# Altium PCB 175-00037, rev2, Front Panel, Mirror Cell Controller .PcbDoc
Units mil, origin at the board's own origin, x right, y up, seen from the top; angles counter-clockwise.
Board outline 2283.46 x 2362.2 mil, 4 copper layers (Top Layer, Internal Plane 1 (*.GP1), Internal Plane 2 (*.GP2), Bottom Layer); 19 components, 40 nets, 170 pads, 4 vias.
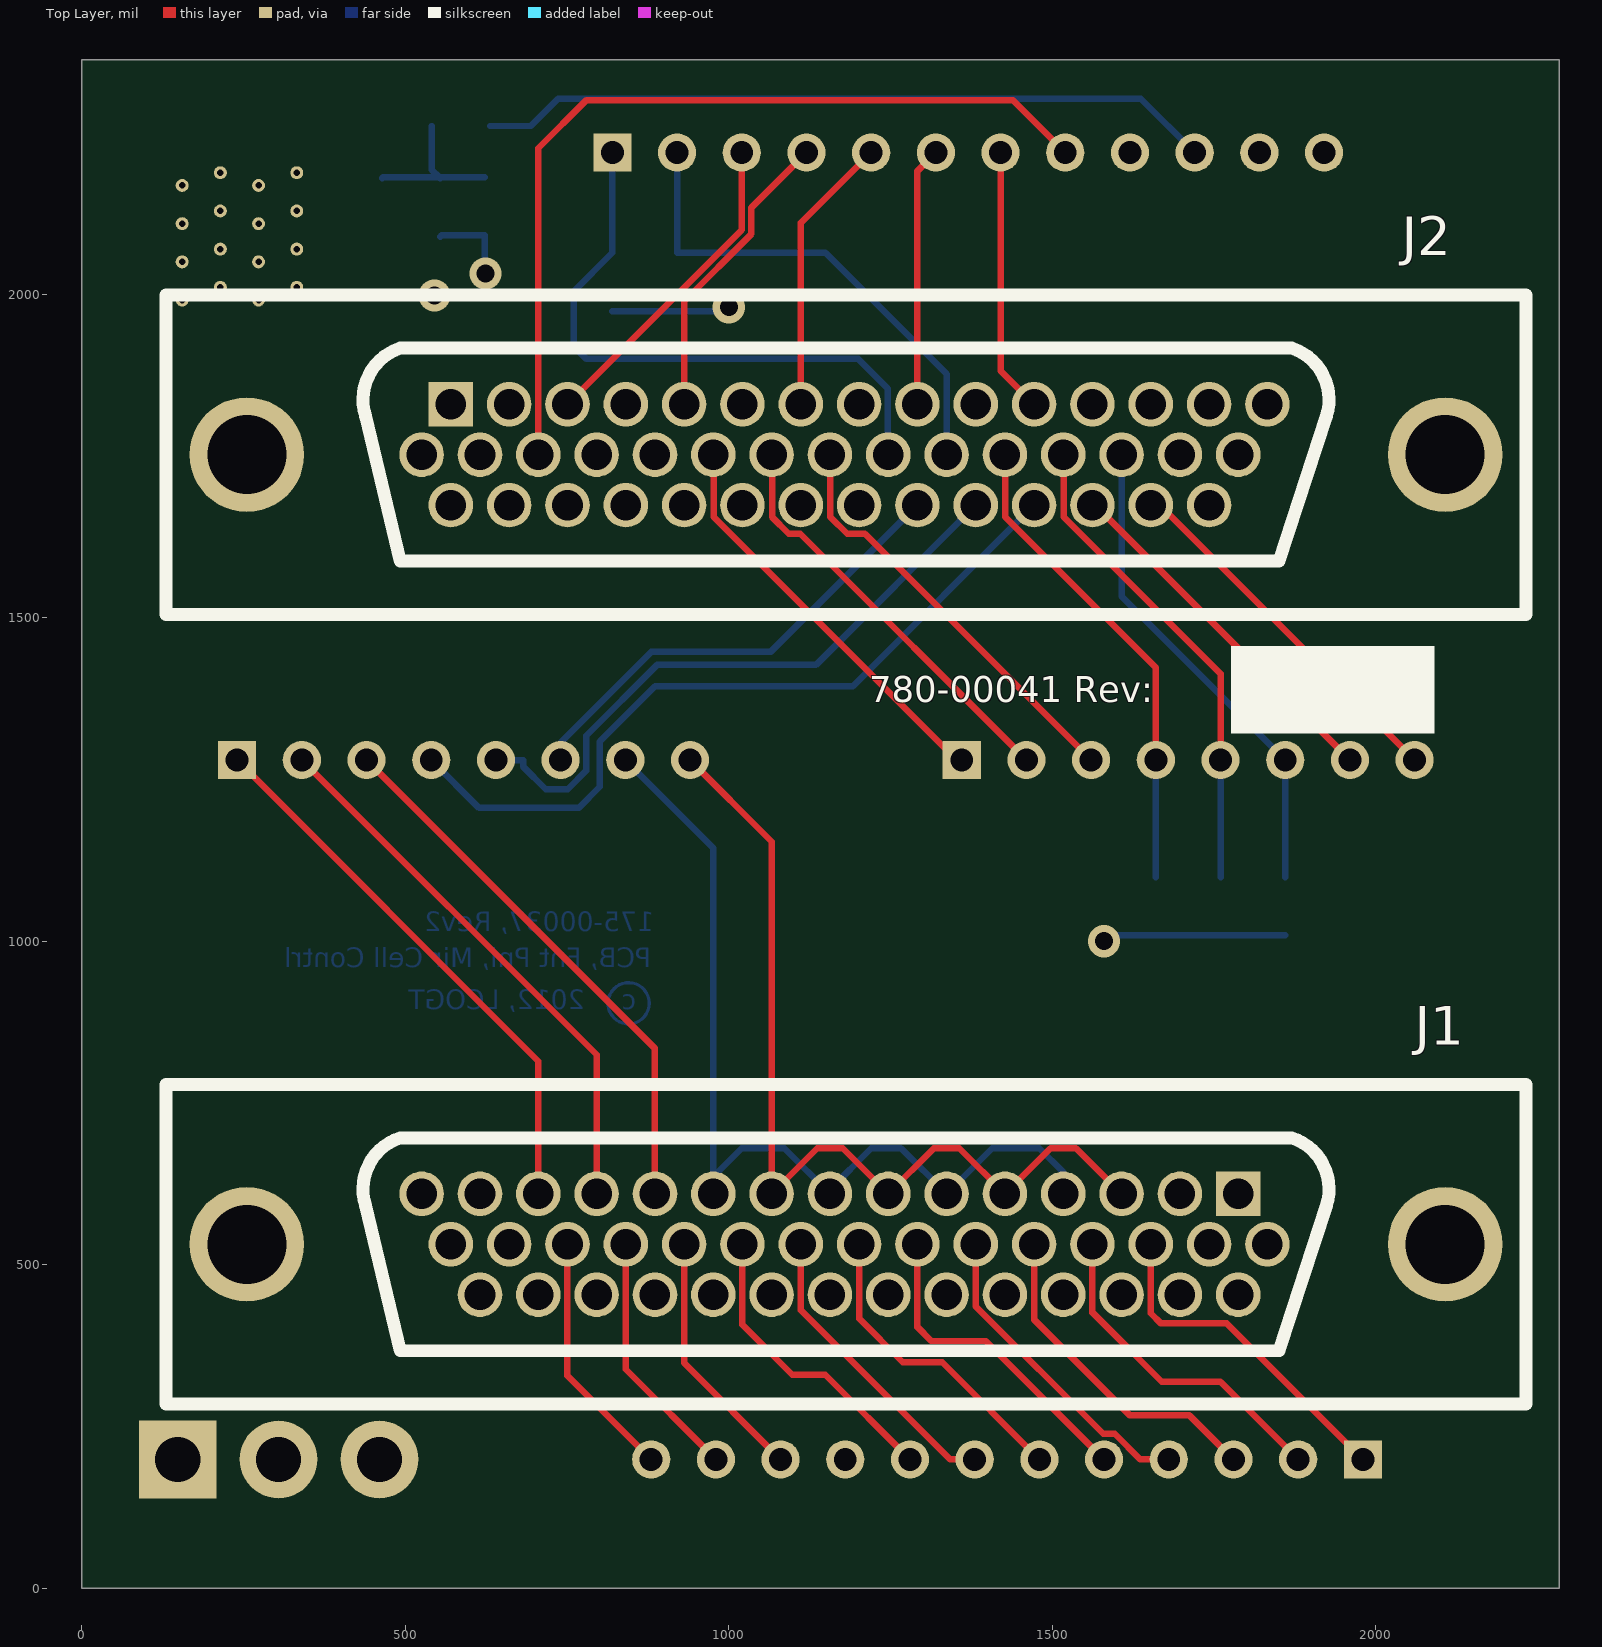
[diagram p0: Top Layer view]
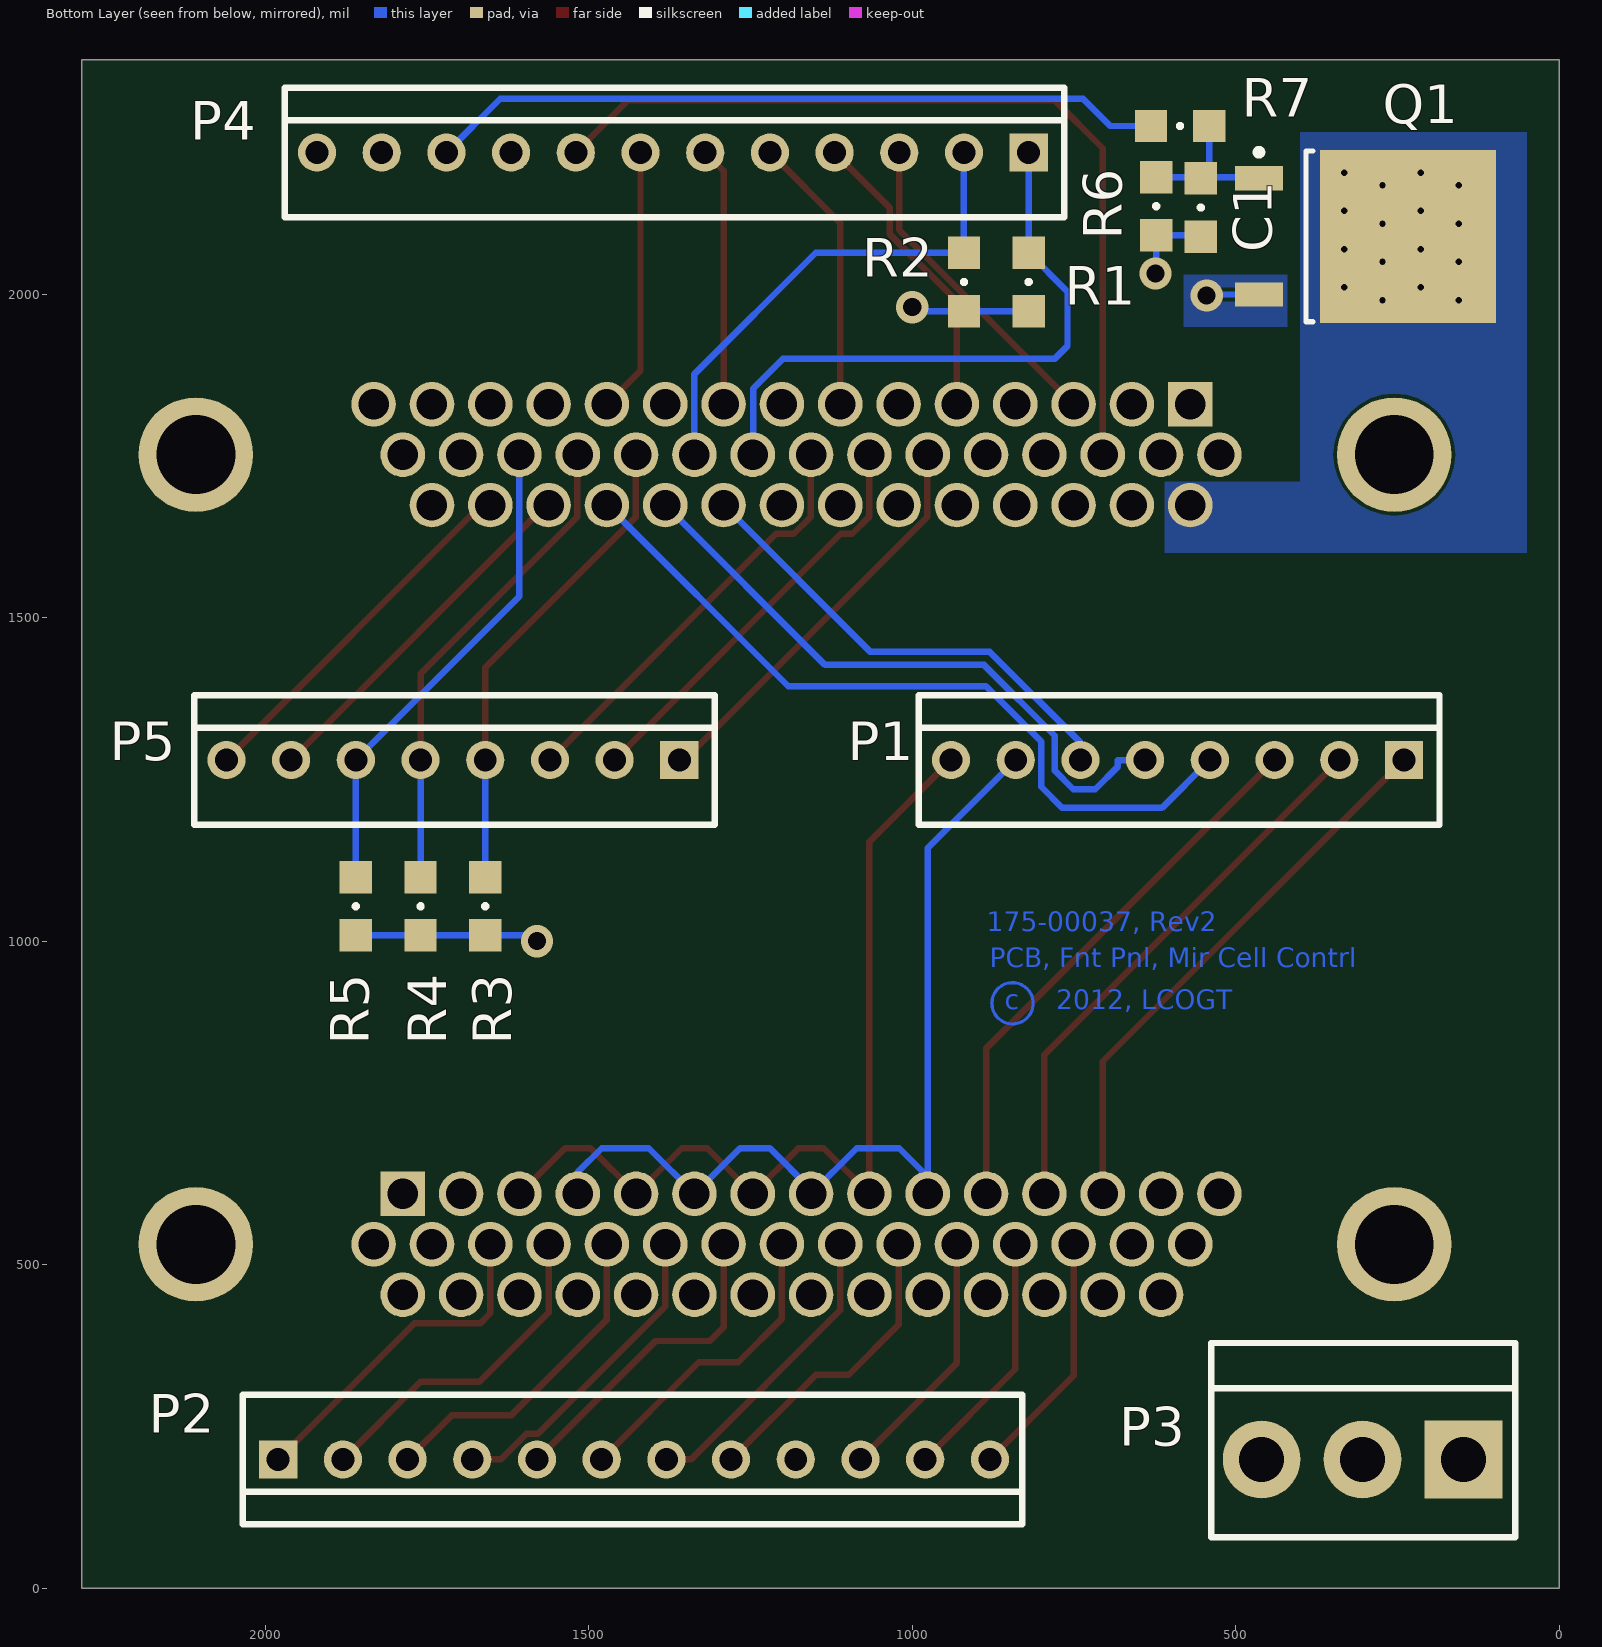
[diagram p1: Bottom Layer view, seen from below]
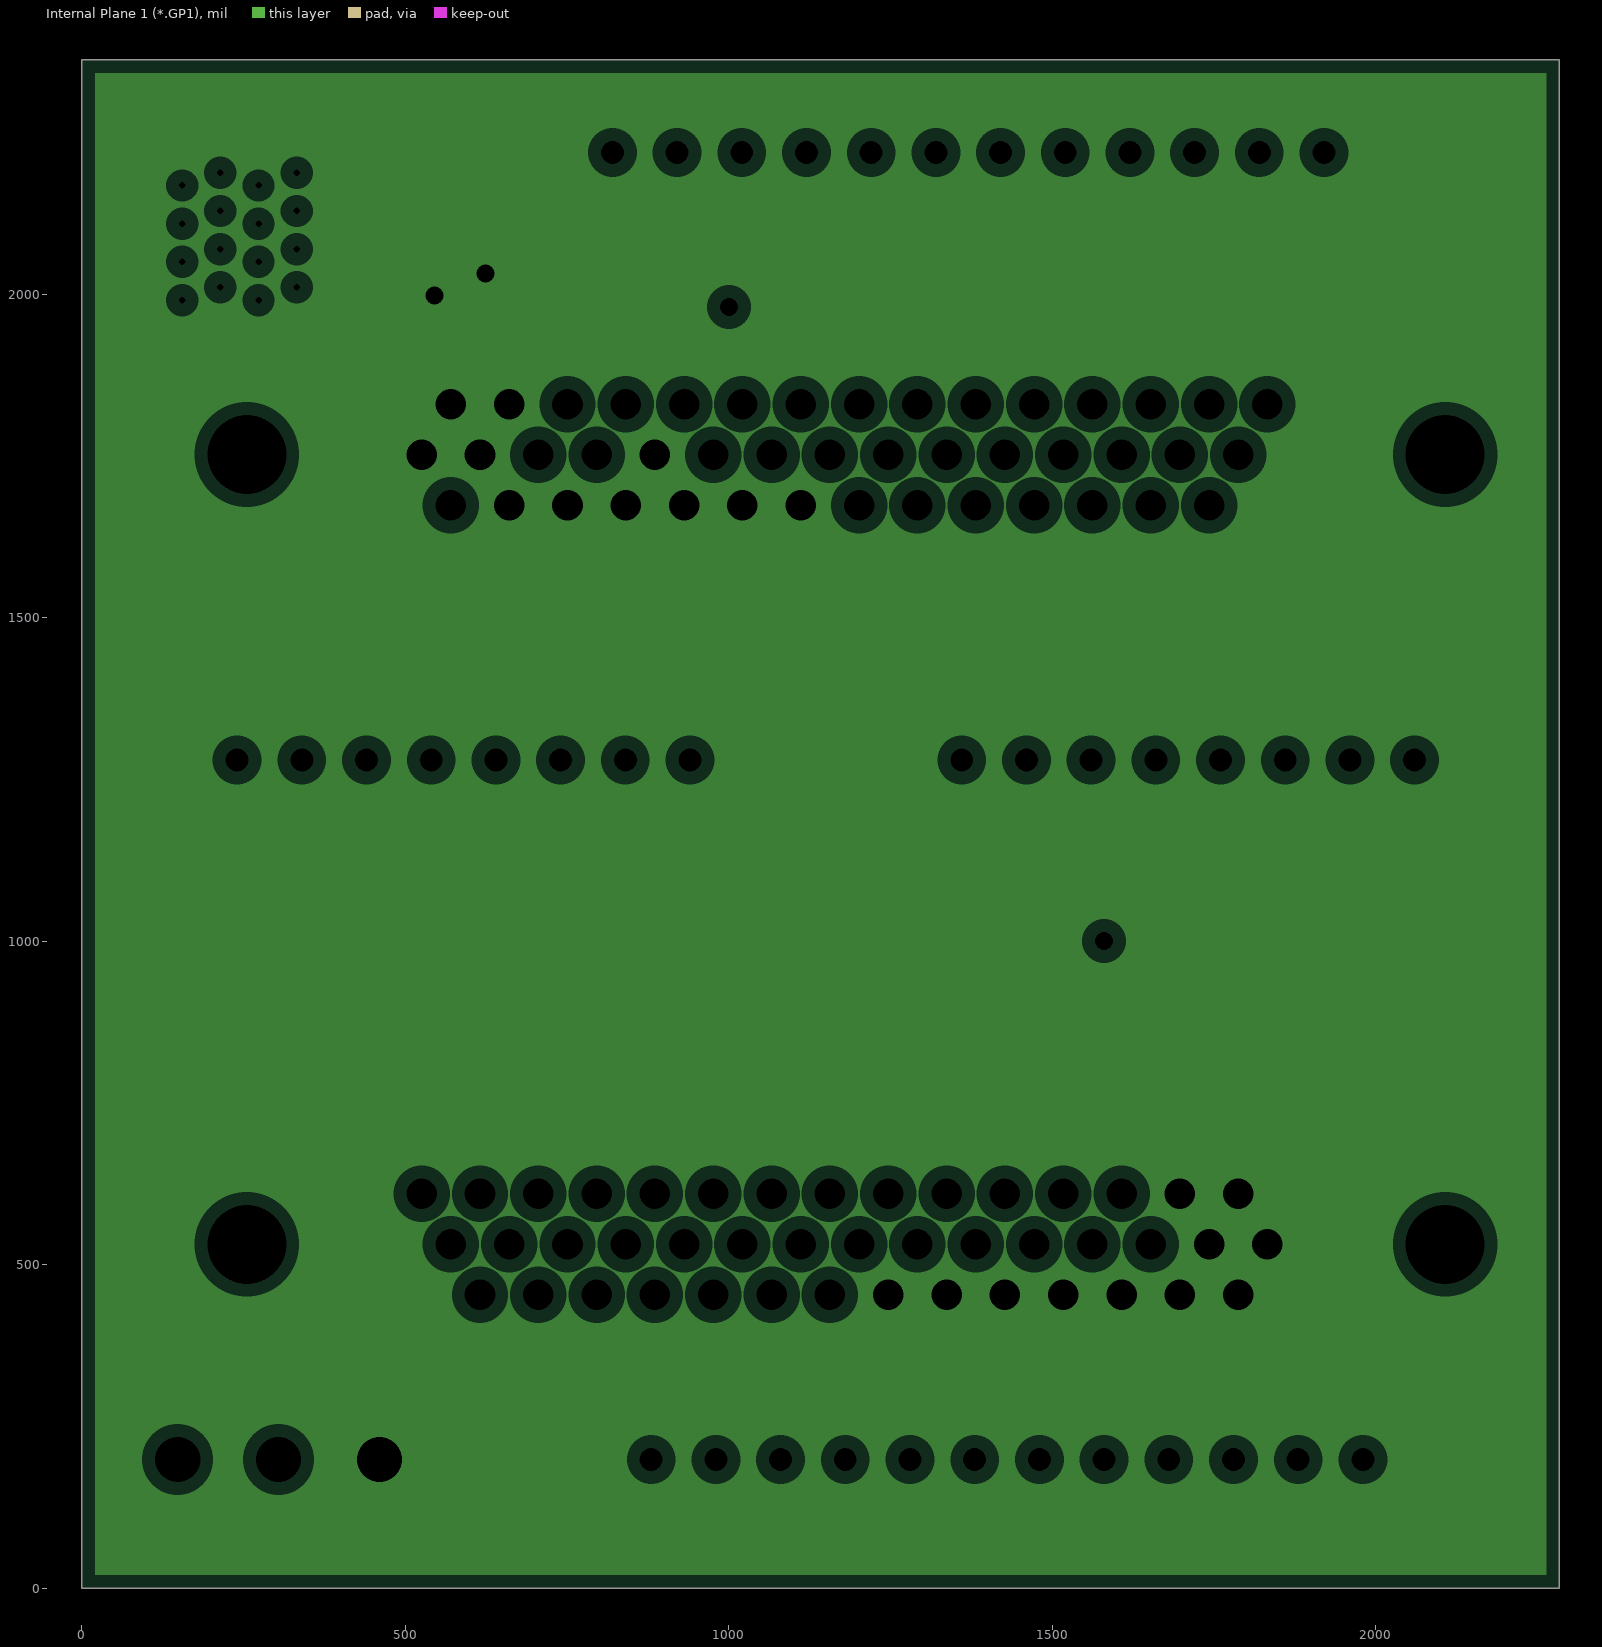
[diagram p2: Internal Plane 1 (*.GP1), clearances drawn from the general rule]
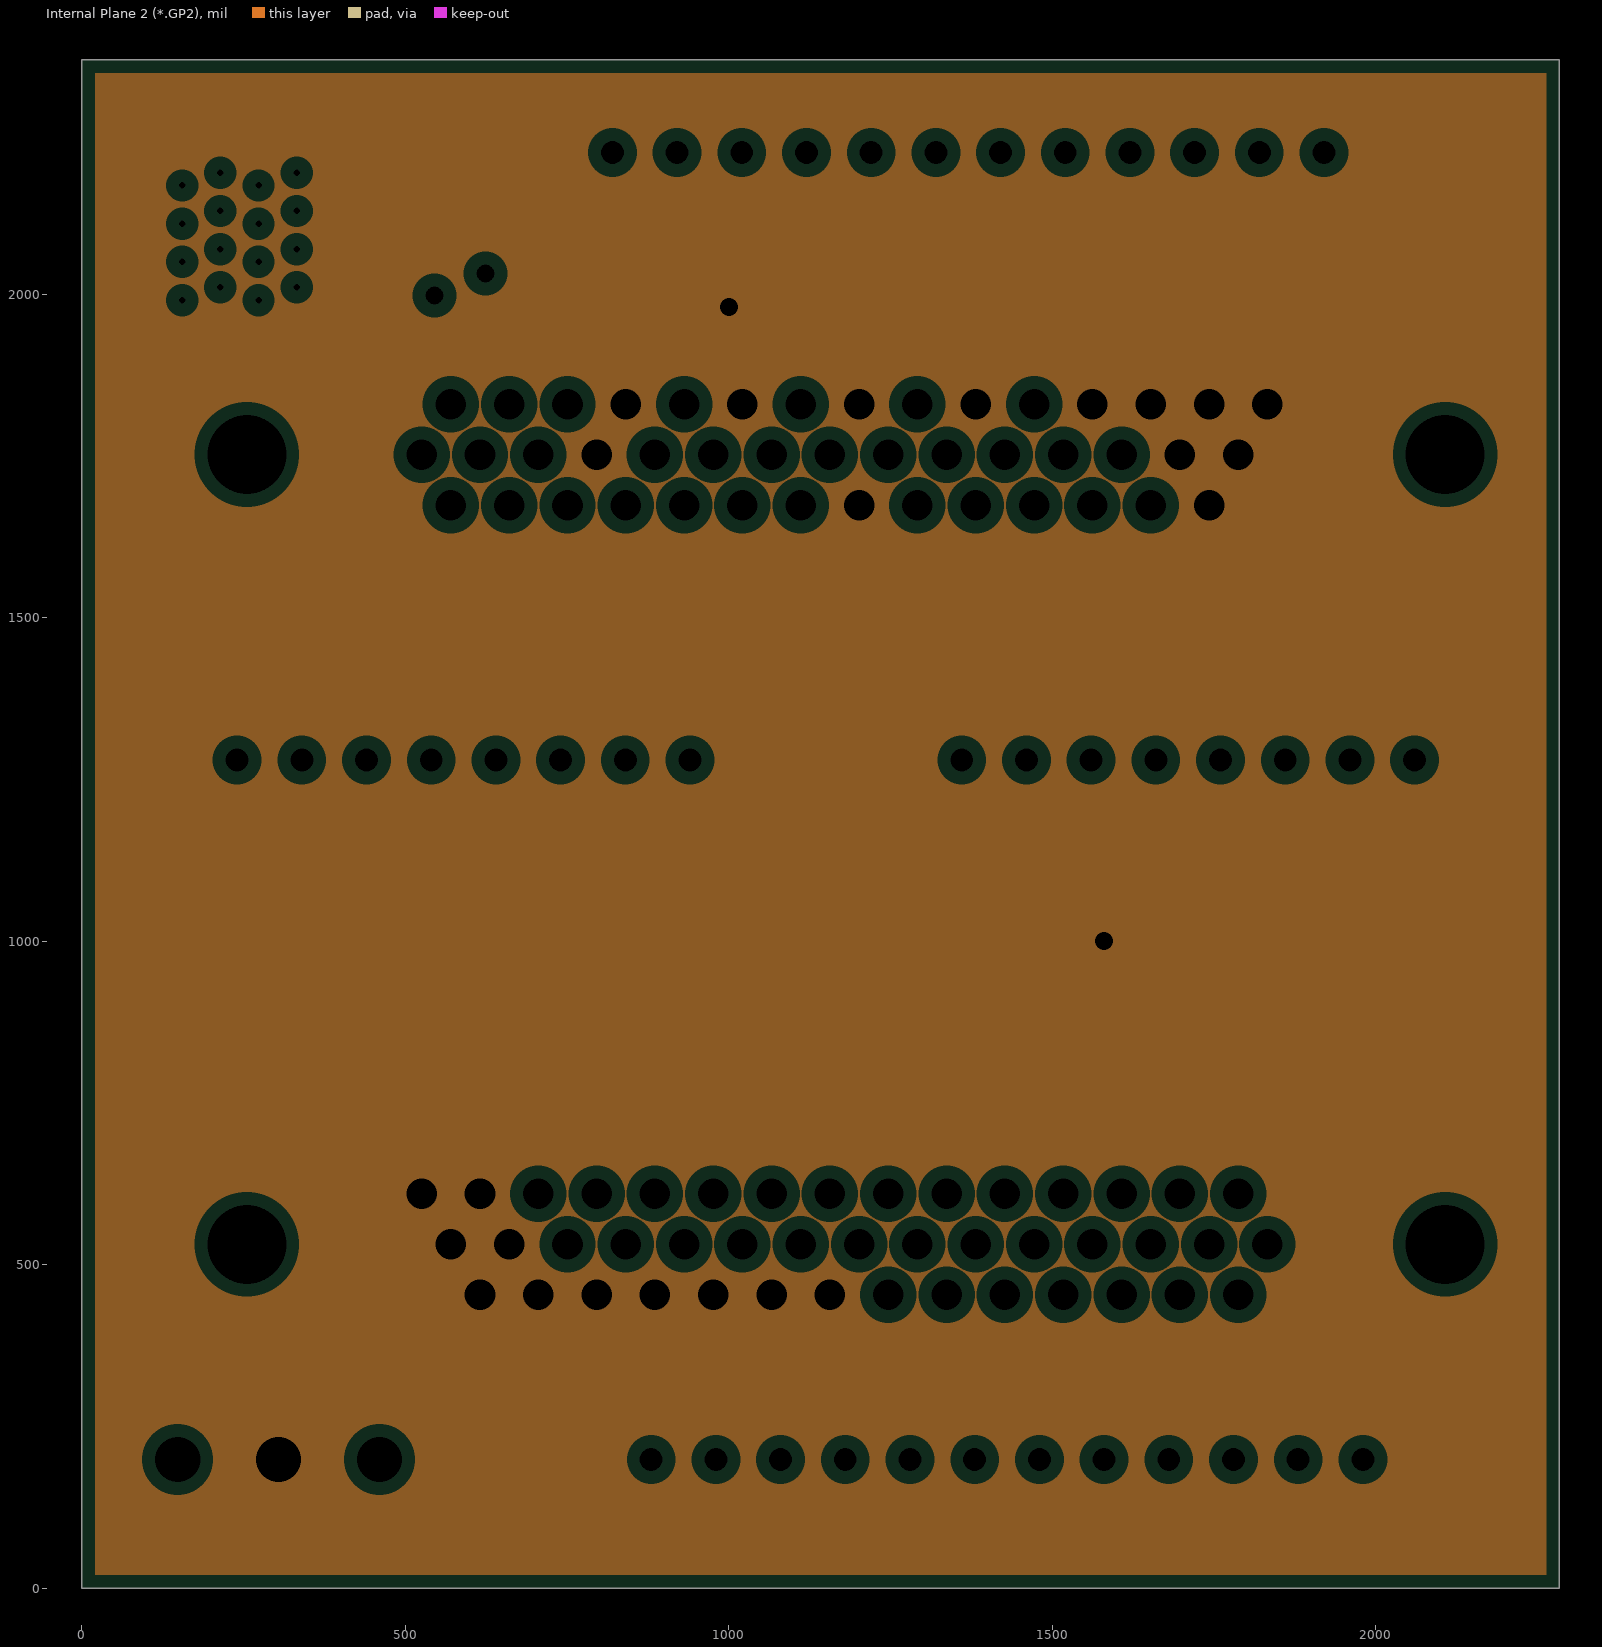
[diagram p3: Internal Plane 2 (*.GP2), clearances drawn from the general rule]

## Layer stack, top to bottom
Top Layer: signal copper 1.4
Dielectric: core 12.6, FR-4, Dk 4.8
Internal Plane 1 (*.GP1): plane copper 1.4, net +24V
Dielectric: prepreg 12.6, FR-4, Dk 4.8
Internal Plane 2 (*.GP2): plane copper 1.4, net GND
Dielectric: core 12.6, FR-4, Dk 4.8
Bottom Layer: signal copper 1.4

## Board outline
0,0 2283.46,0 2283.46,2362.2 0,2362.2

## Design rules (kind name [scope] priority, off if disabled: settings)
Clearance [All] p1: gap=5
HoleSize [All] p1: absolutevalues=TRUE maxlimit=200 minlimit=1 maxpercent=80.000 minpercent=20.000
MinimumSolderMaskSliver [All] p1: minsoldermaskwidth=1
PlaneClearance [All] p1: clearance=20
PlaneConnect [All] p1: planeconnectstyle=Relief reliefexpansion=10 reliefentries=4 reliefconductorwidth=10 reliefairgap=10
PolygonConnect [All] p1: connectstyle=Direct reliefconductorwidth=10 reliefentries=4 polygonreliefangle="90 Angle"
RoomDefinition "780-00041, rev2, Front Panel, Mirror Cell Controller" [InComponentClass('780-00041, rev2, Front Panel, Mirror Cell Controller')] p1: confinementstyle=ConfineIn formatcopy=TRUE lockcomponents=FALSE outline -590.55,-1574.8 6011.84,-1574.8 6011.84,2716.54 -590.55,2716.54
RoutingVias [All] p1: holewidth=28 width=50 viastyle="Through Hole" minholewidth=28 minwidth=50 maxholewidth=28 maxwidth=50
SilkscreenOverComponentPads [All] p1: minsilkscreentomaskgap=10
SolderMaskExpansion [All] p1: expansion=4
Width [All] p1: maxlimit=75 minlimit=5 preferedwidth=5
23 further rules are at their usual default settings.

## Classes and differential pairs
component class "780-00041, rev2, Front Panel, Mirror Cell Controller": C1 J1 J2 P1 P2 P3 P4 P5 Q1 R1 R2 R3 R4 R5 R6 R7

## Components (designator, comment, footprint, x,y, rotation, side; value= is the part's Value field where it differs from the comment)
C1 "Cap SMD" SMD_0805 554,2134 r270 bottom
Designator68 "Comment" "TARGET MECHANICAL 5" -716,-1274 r180 top
Designator69 "Comment" "TARGET MECHANICAL 5" -739,2583 r180 top
Designator70 "Comment" "TARGET MECHANICAL 5" 2826,2624 r180 top
J1 "DSUB 44 HD FEMALE" "CONN DB44 HD FEM SOCKETS PCB" 1181.1,531.5 r0 top
J2 "DSUB 44 HD MALE" "CONN DB44 HD MALE PINS PCB" 1181.1,1751.97 r0 top
P1 "Header 8" "HDR1X8 for IDC" 240,1280 r0 bottom
P2 "Header 12" "HDR1X12 for IDC" 1980,198.9 r180 bottom
P3 "Header 3" "HDR 1X3 0.156\"" 148,198.9 r0 bottom
P4 "Header 12" "HDR1X12 for IDC" 820,2218.9 r0 bottom
P5 "Header 8" "HDR1X8 for IDC" 1360,1280 r0 bottom
Q1 "IRF5303P" "TO-252(D-PAK)  PowerPAD" 292.8,2089.31 r180 bottom
R1 "5ppm" SMD_0805 820,2018.9 r90 bottom
R2 "5ppm" SMD_0805 920,2018.9 r90 bottom
R3 "5ppm" SMD_0805 1660,1053.9 r90 bottom
R4 "5ppm" SMD_0805 1760,1053.9 r90 bottom
R5 "5ppm" SMD_0805 1860,1053.9 r90 bottom
R6 "Res 0805" SMD_0805 623,2136 r270 bottom
R7 "Res 0805" SMD_0805 586,2260 r180 bottom

## Footprints (in the part's own frame and the unit in brackets; to place one, negate y for a bottom-side part, rotate by r counter-clockwise, add the part's x,y. Pads: shape width x height; smd on the part's side, far side on the other; paste and mask are expansions set on the pad)
"CONN DB44 HD FEM SOCKETS PCB" [mm] "PCB VERTICAL MOUNT"
  round 4.5 hole 3.1: 0(-23.525,0) 0(23.525,0)
  rect 1.75x1.75 hole 1.2: 1(15.4,1.98)
  round 1.75 hole 1.2: 2(13.11,1.98) 3(10.82,1.98) 4(8.53,1.98) 5(6.24,1.98) 6(3.95,1.98) 7(1.66,1.98) 8(-0.63,1.98) 9(-2.92,1.98) 10(-5.21,1.98) 11(-7.5,1.98) 12(-9.79,1.98) 13(-12.08,1.98) 14(-14.37,1.98) 15(-16.66,1.98) 16(16.545,0) 17(14.255,0) 18(11.965,0) 19(9.675,0) 20(7.385,0) 21(5.095,0) 22(2.805,0) 23(0.515,0) 24(-1.775,0) 25(-4.065,0) 26(-6.355,0) 27(-8.645,0) 28(-10.935,0) 29(-13.225,0) 30(-15.515,0) 31(15.4,-1.98) 32(13.11,-1.98) 33(10.82,-1.98) 34(8.53,-1.98) 35(6.24,-1.98) 36(3.95,-1.98) 37(1.66,-1.98) 38(-0.63,-1.98) 39(-2.92,-1.98) 40(-5.21,-1.98) 41(-7.5,-1.98) 42(-9.79,-1.98) 43(-12.08,-1.98) 44(-14.37,-1.98)
  silkscreen extent -26.7,-6.27 26.7,6.27
"CONN DB44 HD MALE PINS PCB" [mm] "PCB VERTICAL MOUNT"
  round 4.5 hole 3.1: 0(-23.525,0) 0(23.525,0)
  rect 1.75x1.75 hole 1.2: 1(-15.515,1.98)
  round 1.75 hole 1.2: 2(-13.225,1.98) 3(-10.935,1.98) 4(-8.645,1.98) 5(-6.355,1.98) 6(-4.065,1.98) 7(-1.775,1.98) 8(0.515,1.98) 9(2.805,1.98) 10(5.095,1.98) 11(7.385,1.98) 12(9.675,1.98) 13(11.965,1.98) 14(14.255,1.98) 15(16.545,1.98) 16(-16.66,0) 17(-14.37,0) 18(-12.08,0) 19(-9.79,0) 20(-7.5,0) 21(-5.21,0) 22(-2.92,0) 23(-0.63,0) 24(1.66,0) 25(3.95,0) 26(6.24,0) 27(8.53,0) 28(10.82,0) 29(13.11,0) 30(15.4,0) 31(-15.515,-1.98) 32(-13.225,-1.98) 33(-10.935,-1.98) 34(-8.645,-1.98) 35(-6.355,-1.98) 36(-4.065,-1.98) 37(-1.775,-1.98) 38(0.515,-1.98) 39(2.805,-1.98) 40(5.095,-1.98) 41(7.385,-1.98) 42(9.675,-1.98) 43(11.965,-1.98) 44(14.255,-1.98)
  silkscreen extent -26.7,-6.27 26.7,6.27
"HDR1X8 for IDC" [mm] "Connector; Header; 8 Position"
  rect 1.5x1.5 hole 0.9: 1(0,0)
  round 1.5 hole 0.9: 2(2.54,0) 3(5.08,0) 4(7.62,0) 5(10.16,0) 6(12.7,0) 7(15.24,0) 8(17.78,0)
  silkscreen extent -1.4,-2.54 19.05,2.54
"HDR1X12 for IDC" [mm] "Connector; Header; 12 Position"
  rect 1.5x1.5 hole 0.9: 1(0,0)
  round 1.5 hole 0.9: 2(2.54,0) 3(5.08,0) 4(7.62,0) 5(10.16,0) 6(12.7,0) 7(15.24,0) 8(17.78,0) 9(20.32,0) 10(22.86,0) 11(25.4,0) 12(27.94,0)
  silkscreen extent -1.4,-2.54 29.21,2.54
"HDR 1X3 0.156\"" [mil] "Connector; Header; 3 Position"
  rect 120x120 hole 70: 1(0,0)
  round 120 hole 70: 2(156,0) 3(312,0)
  silkscreen extent -80,-180 390,120
SMD_0805 [mil]
  rect 50x50 smd: 1(-45,0) 2(45,0)
  silkscreen extent -1,-1 1,1
"TARGET MECHANICAL 5" [mil]
"TO-252(D-PAK)  PowerPAD" [mil] "D-PAK, 3-Pads, Body 6.2x6.7mm (max), IPC Medium Density"
  rect 74.8x37.4 smd: 1(-171.26,89.76) 3(-171.26,-89.76)
  round 20 hole 10: 2(-39.37,-78.74) 2(-39.37,-19.68) 2(-39.37,39.37) 2(-39.37,98.43) 2(19.68,-98.43) 2(19.68,-39.37) 2(19.68,19.69) 2(19.68,78.74) 2(78.74,-78.74) 2(78.74,-19.68) 2(78.74,39.37) 2(78.74,98.43) 2(137.8,-98.43) 2(137.8,-39.37) 2(137.8,19.69) 2(137.8,78.74)
  rect 271.65x267.72 smd: 2(59.06,0)
  silkscreen extent -176,-132 -88,135, body extent -98,-132 146,132, height 94

## Part data
C1: "Capacitor"
J1 J2: "Receptacle Assembly, 44 PIN"
P1 P5: "Header, 8-Pin"
P2 P4: "Header, 12-Pin"
P3: library part "Header 3, 0.156", "Header, 3-Pin, 0.156"
Q1: "P-Chan MOSFET"
R1 R2 R3 R4 R5 R6 R7: library part "Res SMD", "Resistor 0805"

## Via types
v1: diameter 50, hole 28, Top Layer to Bottom Layer, 4 vias

## Nets (pads, with @x,y where several pads share a name; then routed paths per layer and width w, separated by ;. In a path a pad name is that pad's centre, name@x,y a point inside that pad or via, vN(x,y) a via of type N, cw(c..) or ccw(c..) an arc to the next point about the centre after c; other vN are vias at no path point)
+24V: C1.2 J1.1 J1.2 J1.16 J1.17 J1.31 J1.32 J1.33 J1.34 J1.35 J1.36 J1.37 J2.1 J2.2 J2.16 J2.17 J2.20 J2.32 J2.33 J2.34 J2.35 J2.36 J2.37 P3.3 Q1.3 R6.2 | length 210.8
  Bottom Layer w10: Q1.3 543.45,1999.55 v1(545,1998) ; C1.2 556,2091 R6.2 623,2033 v1(624,2032)
+24V_MAGNA: J2.31 Q1.2
APANEL: J2.23 P5.3 | length 655.3
  Top Layer w10: J2.23 1156.93,1751.34 1156.93,1655.6 1182.97,1629.57 1210.43,1629.57 P5.3
CTL_FAN1: J1.3 J1.5 J1.7 J1.9 P1.8 | length 1439.1
  Top Layer w10: P1.8 1066.14,1153.86 J1.9 1136.69,680 1175.91,680 J1.7 1317.01,680 1356.22,680 J1.5 1497.32,680 1536.54,680 J1.3
CTL_FAN2: J1.4 J1.6 J1.8 J1.10 P1.7 | length 1429.3
  Bottom Layer w10: P1.7 975.98,1144.02 975.98,635.98 1020,680 1085.75,680 J1.8 1156.3,616.3 1220,680 1266.06,680 J1.6 1407.17,680 1480,680 1516.93,643.07 J1.4
CTL_FANA1: J1.11 P1.3 | length 855.2
  Top Layer w10: P1.3 885.83,834.17 J1.11
CTL_FANA4: J1.12 P1.2 | length 859.3
  Top Layer w10: P1.2 795.67,824.33 J1.12
CTL_FANA8: J1.13 P1.1 | length 863.4
  Top Layer w10: P1.1 705.51,814.49 J1.13
CTL_M1_KNIFE: J2.40 P1.5 | length 979.6
  Bottom Layer w10: P1.5 682,1280 682,1270 717,1235 750.9,1235 779.53,1263.63 779.53,1317.53 889,1427 1134.68,1427 J2.40
CTL_M2_KNIFE: J2.41 P1.4 | length 1197.4
  Bottom Layer w10: P1.4 614,1206 768,1206 800.47,1238.47 800.47,1308.47 886,1394 1191.83,1394 J2.41
DPLY_PROBE: J2.39 P1.6 | length 730.6
  Bottom Layer w10: P1.6 740,1307 880,1447 1064.52,1447 J2.39
GND: J1.14 J1.15 J1.29 J1.30 J1.38 J1.39 J1.40 J1.41 J1.42 J1.43 J1.44 J2.4 J2.6 J2.8 J2.10 J2.12 J2.13 J2.14 J2.15 J2.19 J2.29 J2.30 J2.38 J2.44 P3.2 R1.1 R2.1 R3.1 R4.1 R5.1 | length 466.2
  Bottom Layer w10: R1.1 R2.1 993.9,1973.9 v1(1000,1980) ; v1(1580,1000) 1588.9,1008.9 R3.1 R4.1 R5.1
IR3: J2.26 P5.4 R3.2 | length 749.7
  Top Layer w10: J2.26 1427.4,1751.34 1427.4,1655.6 1660,1423.01 P5.4
  Bottom Layer w10: R3.2 P5.4
IR7: J2.27 P5.5 R4.2 | length 753.8
  Top Layer w10: J2.27 1517.56,1751.34 1517.56,1655.6 1760,1413.16 P5.5
  Bottom Layer w10: R4.2 P5.5
IR11: J2.28 P5.6 R5.2 | length 757.8
  Bottom Layer w10: J2.28 1607.09,1532.91 P5.6 R5.2
NetC1_1: C1.1 Q1.1 R6.1 R7.2 | length 246.1
  Bottom Layer w10: Q1.1 465.98,2181 C1.1@552,2181 ; R7.2 541,2192 C1.1@552,2181 ; C1.1 C1.1@552,2181 ; R6.1 C1.1@552,2181
NetP4_10: P4.10 R7.1 | length 1140.8
  Bottom Layer w10: R7.1 694,2260 736,2302 1636.9,2302 P4.10
PRES_KNIFE: J2.24 P4.1 R1.2 | length 939.3
  Bottom Layer w10: P4.1 R1.2 760,2003.9 760,1920 780,1900 1200,1900 1245.83,1854.17 1245.83,1752.6 J2.24
PRES_PROBE: J2.25 P4.2 R2.2 | length 773.8
  Bottom Layer w10: P4.2 R2.2 1149.33,2063.9 1336.61,1876.61 J2.25
RS485_H: J2.21 P5.1 | length 636.5
  Top Layer w10: J2.21 976.61,1751.34 976.61,1655.6 1352.22,1280 P5.1
  Bottom Layer w10: J2.21 J2.21@976.61,1751.34
RS485_L: J2.22 P5.2 | length 646.3
  Top Layer w10: J2.22 1066.77,1751.34 1066.77,1655.6 1092.81,1629.57 1110.43,1629.57 P5.2
  Bottom Layer w10: J2.22 J2.22@1066.77,1751.34
T1+: J2.3 P4.3 | length 500.6
  Top Layer w10: J2.3 1020,2099.33 P4.3
T3+: J2.5 P4.4 | length 467.3
  Top Layer w10: J2.5 930.91,1989.02 1035,2093.12 1035,2133.9 P4.4
T5+: J2.7 P4.5 | length 434
  Top Layer w10: J2.7 1111.22,2110.12 P4.5
T7+: J2.9 P4.6 | length 400.8
  Top Layer w10: J2.9 1291.54,2190.43 P4.6
T9+: J2.11 P4.7 | length 410.5
  Top Layer w10: P4.7 1420,1881.77 J2.11
T11+: J2.18 P4.8 | length 1352.5
  Top Layer w10: J2.18 705.51,2225.51 780,2300 1438.9,2300 P4.8
TACH_FAN1: J1.18 P2.1 | length 528.1
  Top Layer w10: J1.18 1652.17,424.83 1667.91,409.09 1769.8,409.09 P2.1
TACH_FAN2: J1.19 P2.2 | length 517.6
  Top Layer w10: J1.19 1562.01,425.99 1669,319 1759.9,319 P2.2
TACH_FAN4: J1.20 P2.3 | length 514.1
  Top Layer w10: J1.20 1471.85,415.15 1620,267 1711.9,267 P2.3
TACH_FAN5: J1.21 P2.4 | length 492.4
  Top Layer w10: J1.21 1381.69,435.31 1578.57,238.43 1596.37,238.43 1635.9,198.9 P2.4
TACH_FAN7: J1.22 P2.5 | length 501.2
  Top Layer w10: J1.22 1291.54,403.46 1313,382 1396.9,382 P2.5
TACH_FAN8: J1.23 P2.6 | length 483.7
  Top Layer w10: J1.23 1201.38,416.62 1269,349 1329.9,349 P2.6
TACH_FAN10: J1.24 P2.7 | length 466.1
  Top Layer w10: J1.24 1111.22,429.78 1342.1,198.9 P2.7
TACH_FAN11: J1.25 P2.8 | length 469.7
  Top Layer w10: J1.25 1021.06,406.94 1098,330 1148.9,330 P2.8
TACH_FANA1: J1.26 P2.10 | length 394.4
  Top Layer w10: J1.26 930.91,347.99 P2.10
TACH_FANA4: J1.27 P2.11 | length 390.3
  Top Layer w10: J1.27 840.75,338.15 P2.11
TACH_FANA8: J1.28 P2.12 | length 386.2
  Top Layer w10: J1.28 750.59,328.31 P2.12
TILT_SENS_X: J2.42 P5.7 | length 557.2
  Top Layer w10: J2.42@1565.98,1674.02 P5.7
TILT_SENS_Y: J2.43 P5.8 | length 571
  Top Layer w10: J2.43 1665.98,1674.02 P5.8
pads on no net: J1.0 J2.0 P2.9 P3.1 P4.9 P4.11 P4.12
copper on no net: | length 200.5
  Bottom Layer w5: 876.91,904 ccw(c845,904) 876.91,904

## Polygon pours and split planes (outlines as drawn)
+24V_MAGNA on Bottom Layer "Top Layer (*.GTL)-No Net 1" (solid, pour order 2): 610,1710 400,1710 400,2250 50,2250 50,1600 610,1600 610,1710
+24V on Bottom Layer "Top Layer (*.GTL)-No Net 1" (solid, pour order 4): 580,2030 420,2030 420,1950 580,1950 580,2030
+24V on Internal Plane 1 (*.GP1) (split plane): 2263.37,20.1 20.1,20.1 20.1,2342.11 2263.37,2342.11
GND on Internal Plane 2 (*.GP2) (split plane): 2263.37,20.1 20.1,20.1 20.1,2342.11 2263.37,2342.11

## Other copper
Top Layer:
  text "*.GTL - TOP LAYER GERBER DATA" at -121.54,-1130.08 h80
Bottom Layer:
  text "175-00037, Rev2" at 885,1015 h30
  text "PCB, Fnt Pnl, Mir Cell Contrl" at 880,960 h30
  text "2012, LCOGT" at 777,895 h30
  text "c" at 857,895 h30
  text "*.GBL - BOTTOM LAYER GERBER DATA" at -121.54,-1130.08 h80
Internal Plane 1 (*.GP1) (plane layer: these items are gaps in the copper):
  text "*.GP1 - INTERNAL PLANE LAYER 1 GERBER DATA" at -121.54,-1130.08 h80
Internal Plane 2 (*.GP2) (plane layer: these items are gaps in the copper):
  text "*.GP2 - INTERNAL PLANE LAYER 2 GERBER DATA" at -121.54,-1130.08 h80

## Silkscreen, mask and mechanical layers (free items; w line width, h text height)
Top Overlay:
  rectangle: 1776,1321 2091,1456
  text "780-00041 Rev:" at 1217,1369 h40
  text "*.GTO - TOP OVERLAY GERBER DATA" at -121.54,-1130.08 h80
Bottom Overlay:
  text "*GBO - BOTTOM OVERLAY GERBER DATA" at -121.54,-1130.08 h80
Bottom Paste:
  text "*.GBP - BOTTOM-SIDE SOLDER PASTE MASK" at -121.54,-1130.07 h80
Top Solder:
  text "*.GTS - TOP SOLDER MASK GERBER DATA" at -121.54,-1130.08 h80
Bottom Solder:
  rectangle: 30,844 918,1077
  text "*.GBS - BOTTOM SOLDER MASK GERBER DATA" at -121.54,-1130.08 h80
Mechanical 1:
  the board outline again, w40
Mechanical 2:
  lines w10: -11154,-9021.1 9846,-9021.1 9846,6978.9 -11154,6978.9 -11154,-9021.1 ; 5791,-8915.1 ccw(c5841,-8915.1) 5841,-8965.1 6171,-8965.1 ccw(c6171,-8925.1) 6211,-8925.1 6211,-8755.1 ccw(c6171,-8755.1) 6171,-8715.1 5791,-8715.1 5791,-8915.1 ; 5791,-8625.1 ccw(c5841,-8625.1) 5841,-8675.1 9741,-8675.1 ccw(c9741,-8625.1) 9791,-8625.1 9791,-8435.1 ccw(c9741,-8435.1) 9741,-8385.1 5791,-8385.1 5791,-8625.1 ; 5791,-8295.1 ccw(c5841,-8295.1) 5841,-8345.1 7721,-8345.1 ccw(c7721,-8295.1) 7771,-8295.1 7771,-8145.1 ccw(c7721,-8145.1) 7721,-8095.1 5791,-8095.1 5791,-8295.1 ; 5791,-8015.1 ccw(c5831,-8015.1) 5831,-8055.1 6641,-8055.1 ccw(c6641,-8005.1) 6691,-8005.1 6691,-7855.1 ccw(c6641,-7855.1) 6641,-7805.1 5791,-7805.1 5791,-8015.1 ; 6251,-8925.1 ccw(c6291,-8925.1) 6291,-8965.1 8251,-8965.1 ccw(c8251,-8925.1) 8291,-8925.1 8291,-8755.1 ccw(c8251,-8755.1) 8251,-8715.1 6251,-8715.1 6251,-8925.1 ; 6731,-8005.1 ccw(c6781,-8005.1) 6781,-8055.1 7721,-8055.1 ccw(c7721,-8005.1) 7771,-8005.1 7771,-7855.1 ccw(c7721,-7855.1) 7721,-7805.1 6731,-7805.1 6731,-8005.1 ; 7811,-8295.1 ccw(c7861,-8295.1) 7861,-8345.1 9741,-8345.1 ccw(c9741,-8295.1) 9791,-8295.1 9791,-8145.1 ccw(c9741,-8145.1) 9741,-8095.1 7811,-8095.1 7811,-8295.1 ; 7811,-8005.1 ccw(c7861,-8005.1) 7861,-8055.1 8801,-8055.1 ccw(c8801,-8005.1) 8851,-8005.1 8851,-7855.1 ccw(c8801,-7855.1) 8801,-7805.1 7811,-7805.1 7811,-8005.1 ; 8331,-8915.1 ccw(c8381,-8915.1) 8381,-8965.1 8711,-8965.1 ccw(c8711,-8925.1) 8751,-8925.1 8751,-8755.1 ccw(c8711,-8755.1) 8711,-8715.1 8331,-8715.1 8331,-8915.1 ; 8791,-8925.1 ccw(c8831,-8925.1) 8831,-8965.1 9741,-8965.1 ccw(c9741,-8915.1) 9791,-8915.1 9791,-8765.1 ccw(c9741,-8765.1) 9741,-8715.1 8791,-8715.1 8791,-8925.1 ; 8891,-8005.1 ccw(c8941,-8005.1) 8941,-8055.1 9741,-8055.1 ccw(c9741,-8005.1) 9791,-8005.1 9791,-7855.1 ccw(c9741,-7855.1) 9741,-7805.1 8891,-7805.1 8891,-8005.1
  lines w15: -9743.15,-5661.79 -4272.6,-5661.79 ; -9743.15,-5388.49 -4272.6,-5388.49 ; -9803.15,-7943.5 ccw(c-9715.15,-7943.5) -9715.15,-8031.5 -4300.6,-8031.5 ccw(c-4300.6,-7943.5) -4212.6,-7943.5 -4212.6,-4576.19 ccw(c-4300.6,-4576.19) -4300.6,-4488.19 -9715.15,-4488.19 ccw(c-9715.15,-4576.19) -9803.15,-4576.19 -9803.15,-7943.5
  lines w20: -11133.94,-8375.23 cw(c-11084,-8450.1) -11084,-8360.1 ; -11084,-8400.1 ccw(c-11084,-8450.1) -11134,-8450.1 -11134,-8940.1 ccw(c-11084,-8940.1) -11084,-8990.1 -7884,-8990.1 ccw(c-7884,-8940.1) -7834,-8940.1 -7834,-8600.1 ccw(c-7884,-8600.1) -7884,-8550.1 -10524,-8550.1 ; -7809.12,-8990.04 ccw(c-7884,-8940.1) -7794,-8940.1 -7794,-8600.1 ; 5747.17,-9005.08 cw(c5841,-8915.1) 5711,-8915.1 5711,-7245.1 cw(c5841,-7245.1) 5841,-7115.1 9741,-7115.1 cw(c9741,-7245.1) 9829.66,-7150.03 ; -3624,-8841.1 ccw(c-3494,-8841.1) -3494,-8971.1 1246,-8971.1 ccw(c1246,-8841.1) 1376,-8841.1 1376,-7251.1 ccw(c1246,-7251.1) 1246,-7121.1 -3494,-7121.1 ccw(c-3494,-7251.1) -3624,-7251.1 -3624,-8841.1 ; 5751,-8915.1 ccw(c5841,-8915.1) 5841,-9005.1 9741,-9005.1 ccw(c9741,-8915.1) 9831,-8915.1 9831,-7245.1 ccw(c9741,-7245.1) 9741,-7155.1 5841,-7155.1 ccw(c5841,-7245.1) 5751,-7245.1 5751,-8915.1
  lines w24: -1074,-8811.1 -924,-8811.1 ; -1074,-8561.1 -924,-8561.1 ; -1074,-8311.1 -924,-8311.1 ; -1074,-8061.1 -924,-8061.1 ; -1074,-7811.1 -924,-7811.1
  lines w30: -11654,-9521.1 10346,-9521.1 10346,7478.9 -11654,7478.9 -11654,-9521.1
  lines w50: 5936,-7656.1 7586,-7656.1 ; 5936,-7276.1 7586,-7276.1 ; 7586,-7656.1 5926,-7656.1 5926,-7276.1 7586,-7276.1 ; 7586,-7656.1 7586,-7276.1
  text "NOTES (UNLESS OTHERWISE SPECIFIED):" at -10834,6454.9 h90
  text "GENERAL" at -10734,6254.9 h90
  text "1)" at -10634,6054.85 h75
  text "PCB IS 4-LAYER, .062\" THICK." at -10434,6054.87 h75
  text "2)" at -10634,5904.85 h75
  text "CONSTRUCTION IS SOLDER-MASK-OVER-BARE-COPPER (SMOBC)." at -10434,5904.85 h75
  text "3)" at -10634,5754.85 h75
  text "ACCEPTABILITY SHALL BE BASED ON IPC-A-600, CLASS 2." at -10434,5754.85 h75
  text "4)" at -10634,5604.85 h75
  text "THE FOLLOWING GERBER RS274X PHOTO TOOL FILES SHALL BE USED TO DEFINE ALL CIRCUIT FEATURES:" at -10434,5604.85 h75
  text "*.GTL - TOP LAYER GERBER DATA" at -10160,5393.9 h80
  text "*.GP1 - INTERNAL PLANE LAYER 1 GERBER DATA" at -10160,4779.23 h80
  text "*.GP2 - INTERNAL PLANE LAYER 2 GERBER DATA" at -10160,4625.57 h80
  text "*.GBL - BOTTOM LAYER GERBER DATA" at -10160,4010.9 h80
  text "*.GTO - TOP OVERLAY GERBER DATA" at -10160,3857.24 h80
  text "*.GTS - TOP SOLDER MASK GERBER DATA" at -10160,3703.57 h80
  text "*GBO - BOTTOM OVERLAY GERBER DATA" at -10160,3396.24 h80
  text "*.GBS - BOTTOM SOLDER MASK GERBER DATA" at -10160,3242.57 h80
  text "*.GBP - BOTTOM-SIDE SOLDER PASTE MASK" at -10160.01,3088.9 h80
  text "5)" at -10731,2373.13 h75
  text "THE PHOTO TOOL SHALL NOT BE COMPENSATED WITHOUT PRIOR ENGINEERING APPROVAL." at -10531,2373.13 h75
  text "PCB DESIGNER: RICH LOBDILL   PH (805) 880-1621  FAX (805) 961-1792." at -10531,2223.18 h75
  text "FABRICATION TOLERANCES" at -10676,1896.9 h90
  text "6)" at -10576,1696.85 h75
  text "END PRODUCT CONDUCTOR WIDTHS AND PAD DIAMETERS SHALL NOT VARY MORE THAN" at -10376,1696.85 h75
  text "0.002\" FROM THE 1:1 DIMENSIONS OF THE MASTER ARTWORK." at -10376,1546.9 h75
  text "7)" at -10576,1396.85 h75
  text "THE CONDUCTIVE PATTERN SHALL BE POSITIONED SO THAT THE LOCATION OF ANY PAD OR" at -10376,1396.85 h75
  text "LAND SHALL BE WITHIN 0.005\" DIAMETER TO THE TRUE POSITION OF THE HOLE IT CIRCUMSCRIBES." at -10376,1246.9 h75
  text "8)" at -10576,1096.85 h75
  text "ALL DRILL HOLE SIZES AND TOLERANCES APPLY AFTER PLATING." at -10376,1096.85 h75
  text "9)" at -10576,946.85 h75
  text "THE MINIMUM ANNULAR RING SHALL BE 0.005\"." at -10376,946.85 h75
  text "10)" at -10631,796.85 h75
  text "BOW AND TWIST SHALL NOT EXCEED 0.010\" PER INCH." at -10376,796.85 h75
  text "11)" at -10621,646.85 h75
  text "FOR PCB ROUTING DIMENSIONS: .XXX = +/-.005\"  .XX = +/-.020\"" at -10376,646.85 h75
  text "MATERIAL" at -10676,446.9 h90
  text "12)" at -10631,246.85 h75
  text "BASE MATERIAL IS FR4 EPOXY FIBERGLASS" at -10369,240.9 h75
  text "SEE STACK-UP LEGEND FOR COPPER CLADDING CALL OUTS" at -10369,100.9 h75
  text "13)" at -10631,96.85 h75
  text "PLATING" at -10676,-103.1 h90
  text "14)" at -10631,-298.15 h75
  text "ALL HOLES AND CONDUCTIVE SURFACES SHALL BE PLATED WITH A MINIMUM OF 0.001\" COPPER." at -10376,-298.15 h75
  text "15)" at -10631,-448.15 h75
  text "AFTER SOLDERMASK, ALL EXPOSED HOLES AND CONDUCTIVE SURFACES SHALL BE COATED" at -10376,-448.15 h75
  text "WITH A GOLD IMMERSION PLATING TO PRESERVE SOLDERABILITY." at -10369,-599.1 h75
  text "16)" at -10605,-781.1 h75
  text "COPPER THEVING ON LAYERS AS NEEDED" at -10366,-783.15 h75
  text "COATINGS" at -10676,-1093.1 h90
  text "THE SOLDERMASK SHALL BE BLACK LIQUID PHOTO-IMAGEABLE PER IPC-SM-840, TYPE-B, CLASS 2." at -10376,-1288.15 h75
  text "17)" at -10620,-1291.1 h75
  text "THE SOLDERMASK REGISTRATION ALLOWANCE IS 0.003\".  THERE SHALL BE NO SOLDERMASK ON" at -10376,-1438.15 h75
  text "18)" at -10630,-1466.1 h75
  text "ANY SOLDER PAD OR LAND." at -10376,-1588.15 h75
  text "MARKING" at -10676,-1788.1 h90
  text "THE LEGEND SHALL BE SCREEN-PRINTED USING PERMANENT YELLOW EPOXY INK." at -10376,-1983.15 h75
  text "19)" at -10635,-1986.1 h75
  text "THE SCREEN PRINTING REGISTRATION ALLOWANCE IS 0.007\".  THERE SHALL BE NO INK ON ANY" at -10376,-2133.15 h75
  text "20)" at -10635,-2151.1 h75
  text "SOLDER PAD OR LAND." at -10376,-2283.1 h75
  text "21)" at -10631,-2418.15 h75
  text "THE VENDOR CODE AND UL FLAMMABILITY RATING MAY BE ETCHED IN THE FOIL OR MARKED IN" at -10376,-2433.15 h75
  text "PERMANENT EPOXY INK (VENDOR'S OPTION)." at -10376,-2583.1 h75
  text "ELECTRICAL TESTING" at -10676,-2783.1 h90
  text "22)" at -10631,-2978.15 h75
  text "ALL BOARDS SHALL BE ELECTRICALLY TESTED TO THE SUPPLIED IPC-D-356A NET LIST" at -10376,-2978.15 h75
  text "FOR CONTINUITY, OPENS AND SHORTS." at -10376,-3128.1 h75
  text "Layer Stack Up Detail for: 175-00037, rev2, Front Panel, Mirror Cell Controller.PcbDoc" at -9743.15,-4981.24 h63
  text "Layer" at -9743.15,-5490.49 h63
  text "COPPER THICKNESS" at -6692.91,-5590.55 h100
  text "Name" at -9743.15,-5616.49 h63
  text "Top Layer" at -9743.15,-5939.57 h88
  text "1/2 oz,  1 oz Finished" at -7047.24,-6023.62 h100
  text "Internal Plane 1 (*.GP1)" at -9743.15,-6480.12 h88
  text "1 oz" at -6968.5,-6496.06 h100
  text "1 oz" at -6968.5,-6968.5 h100
  text "Internal Plane 2 (*.GP2)" at -9743.15,-7020.67 h88
  text "Las Cumbres Observatory, Inc." at 7756,-7296.1 h90
  text "Las Cumbres Observatory" at 5986,-7416.1 h150
  text "PRIMARY PCB SPECIFICATIONS" at -3177,-7431.1 h200
  text "6740 Cortona Dr." at 8196,-7450.1 h90
  text "1/2 oz,  1 oz Finished" at -7047.24,-7519.69 h100
  text "Bottom Layer" at -9743.15,-7561.22 h88
  text "Global Telescope Network" at 6146,-7576.1 h125
  text "Goleta, CA 93117" at 8146,-7600.1 h90
  text "(REFER TO COMPLETE SPEC LISTING AT LEFT FOR FURTHER DETAILS)" at -3524,-7636.1 h100
  text "www.lcogt.net" at 8286,-7746.1 h90
  text "DATE" at 5811,-7856.9 h32
  text "DESIGNED" at 6751,-7856.9 h32
  text "DRAWN" at 7831,-7856.9 h32
  text "SCALE" at 8911,-7856.9 h32
  text "NUMBER OF LAYERS" at -3424,-7886.1 h150
  text "4" at 126,-7886.12 h150
  text "Rich Lobdill" at 8136,-7956.1 h55
  text "Rich Lobdill" at 7011,-7961.1 h55
  text "1 : 1" at 9196,-7975.1 h90
  text "3/20/2012" at 5841,-7982.1 h90
  text "FINISHED THICKNESS" at -3424,-8136.1 h150
  text ".062\"" at -49,-8136.1 h150
  text "CHECKED/DATE" at 5811,-8146.9 h32
  text "APPROVED/DATE" at 7831,-8146.9 h32
  text "BASE MATERIAL" at -3424,-8386.1 h150
  text "FR4" at -124,-8386.1 h150
  text "TITLE" at 5811,-8436.9 h32
  text "175-00037, FRNT PNL, MIRROR CELL CONTROLLER" at 6031,-8581.1 h100
  text "GOLD IMMERSION" at -618,-8603.1 h150
  text "PLATING TYPE" at -3424,-8636.1 h150
  text "THIS DRAWING EMBODIES A PROPRIETARY DESIGN OWNED BY LAS CUMBRES" at -11044,-8660.1 h60
  text "OBSERVATORY.  IT IS SUBMITTED FOR A SPECIFIC PURPOSE UNDER A CON-" at -11044,-8760.1 h60
  text "SIZE" at 5811,-8766.9 h32
  text "DOC NO." at 6271,-8766.9 h32
  text "REV" at 8351,-8766.9 h32
  text "SHEET" at 8811,-8766.9 h32
  text "FIDENTIAL RELATIONSHIP, AND EXCEPT FOR PURPOSES EXPRESSLY GRANTED" at -11044,-8855.1 h60
  text "OF" at 9241,-8870.1 h60
  text "SOLDER MASK COLOR" at -3424,-8886.1 h150
  text "BLACK" at 1,-8886.1 h150
  text "1" at 9071,-8890.1 h100
  text "X" at 9471,-8890.1 h100
  text "2" at 8496,-8903.1 h130
  text "-" at 6826,-8905.1 h130
  text "GPT" at 7545.72,-8919.9 h130
  text "C" at 5946,-8921.1 h100
  text "IN WRITING, ALL RIGHTS ARE RESERVED BY LAS CUMBRES OBSERVATORY." at -11044,-8945.1 h60
Mechanical 5:
  text "175-00037  Rev 2" at -100.5,-699.5 h80
  text "LAS CUMBRES OBSERVATORY     3/20/2012" at -100.5,-849.51 h80
Drill Drawing:
  lines w10: -11154,-9021.1 9846,-9021.1 9846,6978.9 -11154,6978.9 -11154,-9021.1 ; 5791,-8915.1 ccw(c5841,-8915.1) 5841,-8965.1 6171,-8965.1 ccw(c6171,-8925.1) 6211,-8925.1 6211,-8755.1 ccw(c6171,-8755.1) 6171,-8715.1 5791,-8715.1 5791,-8915.1 ; 5791,-8625.1 ccw(c5841,-8625.1) 5841,-8675.1 9741,-8675.1 ccw(c9741,-8625.1) 9791,-8625.1 9791,-8435.1 ccw(c9741,-8435.1) 9741,-8385.1 5791,-8385.1 5791,-8625.1 ; 5791,-8305.1 ccw(c5831,-8305.1) 5831,-8345.1 7251,-8345.1 ccw(c7251,-8295.1) 7301,-8295.1 7301,-8145.1 ccw(c7251,-8145.1) 7251,-8095.1 5791,-8095.1 5791,-8305.1 ; 6251,-8925.1 ccw(c6291,-8925.1) 6291,-8965.1 8251,-8965.1 ccw(c8251,-8925.1) 8291,-8925.1 8291,-8755.1 ccw(c8251,-8755.1) 8251,-8715.1 6251,-8715.1 6251,-8925.1 ; 7341,-8295.1 ccw(c7391,-8295.1) 7391,-8345.1 8801,-8345.1 ccw(c8801,-8295.1) 8851,-8295.1 8851,-8145.1 ccw(c8801,-8145.1) 8801,-8095.1 7341,-8095.1 7341,-8295.1 ; 8331,-8915.1 ccw(c8381,-8915.1) 8381,-8965.1 8711,-8965.1 ccw(c8711,-8925.1) 8751,-8925.1 8751,-8755.1 ccw(c8711,-8755.1) 8711,-8715.1 8331,-8715.1 8331,-8915.1 ; 8791,-8925.1 ccw(c8831,-8925.1) 8831,-8965.1 9741,-8965.1 ccw(c9741,-8915.1) 9791,-8915.1 9791,-8765.1 ccw(c9741,-8765.1) 9741,-8715.1 8791,-8715.1 8791,-8925.1 ; 8891,-8295.1 ccw(c8941,-8295.1) 8941,-8345.1 9741,-8345.1 ccw(c9741,-8295.1) 9791,-8295.1 9791,-8145.1 ccw(c9741,-8145.1) 9741,-8095.1 8891,-8095.1 8891,-8295.1
  lines w20: -11128.94,-8390.23 cw(c-11079,-8465.1) -11079,-8375.1 ; -11079,-8415.1 ccw(c-11079,-8465.1) -11129,-8465.1 -11129,-8955.1 ccw(c-11079,-8955.1) -11079,-9005.1 -7879,-9005.1 ccw(c-7879,-8955.1) -7829,-8955.1 -7829,-8615.1 ccw(c-7879,-8615.1) -7879,-8565.1 -10519,-8565.1 ; -7804.12,-9005.04 ccw(c-7879,-8955.1) -7789,-8955.1 -7789,-8615.1 ; 5745.92,-9003.76 cw(c5841,-8915.1) 5711,-8915.1 5711,-8095.1 cw(c5791,-8095.1) 5791,-8015.1 9741,-8015.1 cw(c9741,-8145.1) 9829.66,-8050.03 ; 5751,-8915.1 ccw(c5841,-8915.1) 5841,-9005.1 9741,-9005.1 ccw(c9741,-8915.1) 9831,-8915.1 9831,-8145.1 ccw(c9741,-8145.1) 9741,-8055.1 5791,-8055.1 ccw(c5791,-8095.1) 5751,-8095.1 5751,-8915.1
  lines w30: -11654,-9521.1 10346,-9521.1 10346,7478.9 -11654,7478.9 -11654,-9521.1
  text ".Legend" at -680,-4904.1 h100
  text "DESIGNED" at 5811,-8146.9 h32
  text "DRAWN" at 7361,-8146.9 h32
  text "SCALE" at 8911,-8146.9 h32
  text "Rich Lobdill" at 6297,-8243.1 h55
  text "Rich Lobdill" at 7858,-8245.1 h55
  text "1 : 1" at 9196,-8265.1 h90
  text "TITLE" at 5811,-8436.9 h32
  text "175-00037, FRNT PNL, MIRROR CELL CONTROLLER" at 6028,-8581.1 h100
  text "THIS DRAWING EMBODIES A PROPRIETARY DESIGN OWNED BY LAS CUMBRES" at -11039,-8675.1 h60
  text "SIZE" at 5811,-8766.9 h32
  text "DOC NO." at 6271,-8766.9 h32
  text "REV" at 8351,-8766.9 h32
  text "SHEET" at 8811,-8766.9 h32
  text "OBSERVATORY.  IT IS SUBMITTED FOR A SPECIFIC PURPOSE UNDER A CON-" at -11039,-8775.1 h60
  text "FIDENTIAL RELATIONSHIP, AND EXCEPT FOR PURPOSES EXPRESSLY GRANTED" at -11039,-8870.1 h60
  text "OF" at 9241,-8870.1 h60
  text "2" at 9056,-8890.1 h100
  text "X" at 9471,-8890.1 h100
  text "-" at 6826,-8905.1 h130
  text "2" at 8491,-8905.1 h130
  text "C" at 5946,-8921.1 h120
  text "GD1" at 7646,-8921.1 h120
  text "IN WRITING, ALL RIGHTS ARE RESERVED BY LAS CUMBRES OBSERVATORY." at -11039,-8960.1 h60

## Dimensions
0,0 to 0,2362.2 on Mechanical 2
0,0 to 2283.46,0 on Mechanical 2